# Altium PCB PCB1.PcbDoc
Units mil, origin at the board's own origin, x right, y up, seen from the top; angles counter-clockwise.
Board outline 3290 x 1870 mil, 2 copper layers (Top Layer, Bottom Layer); 97 components, 61 nets, 288 pads, 265 vias.
Unrouted connection lines stored in the file: 2.
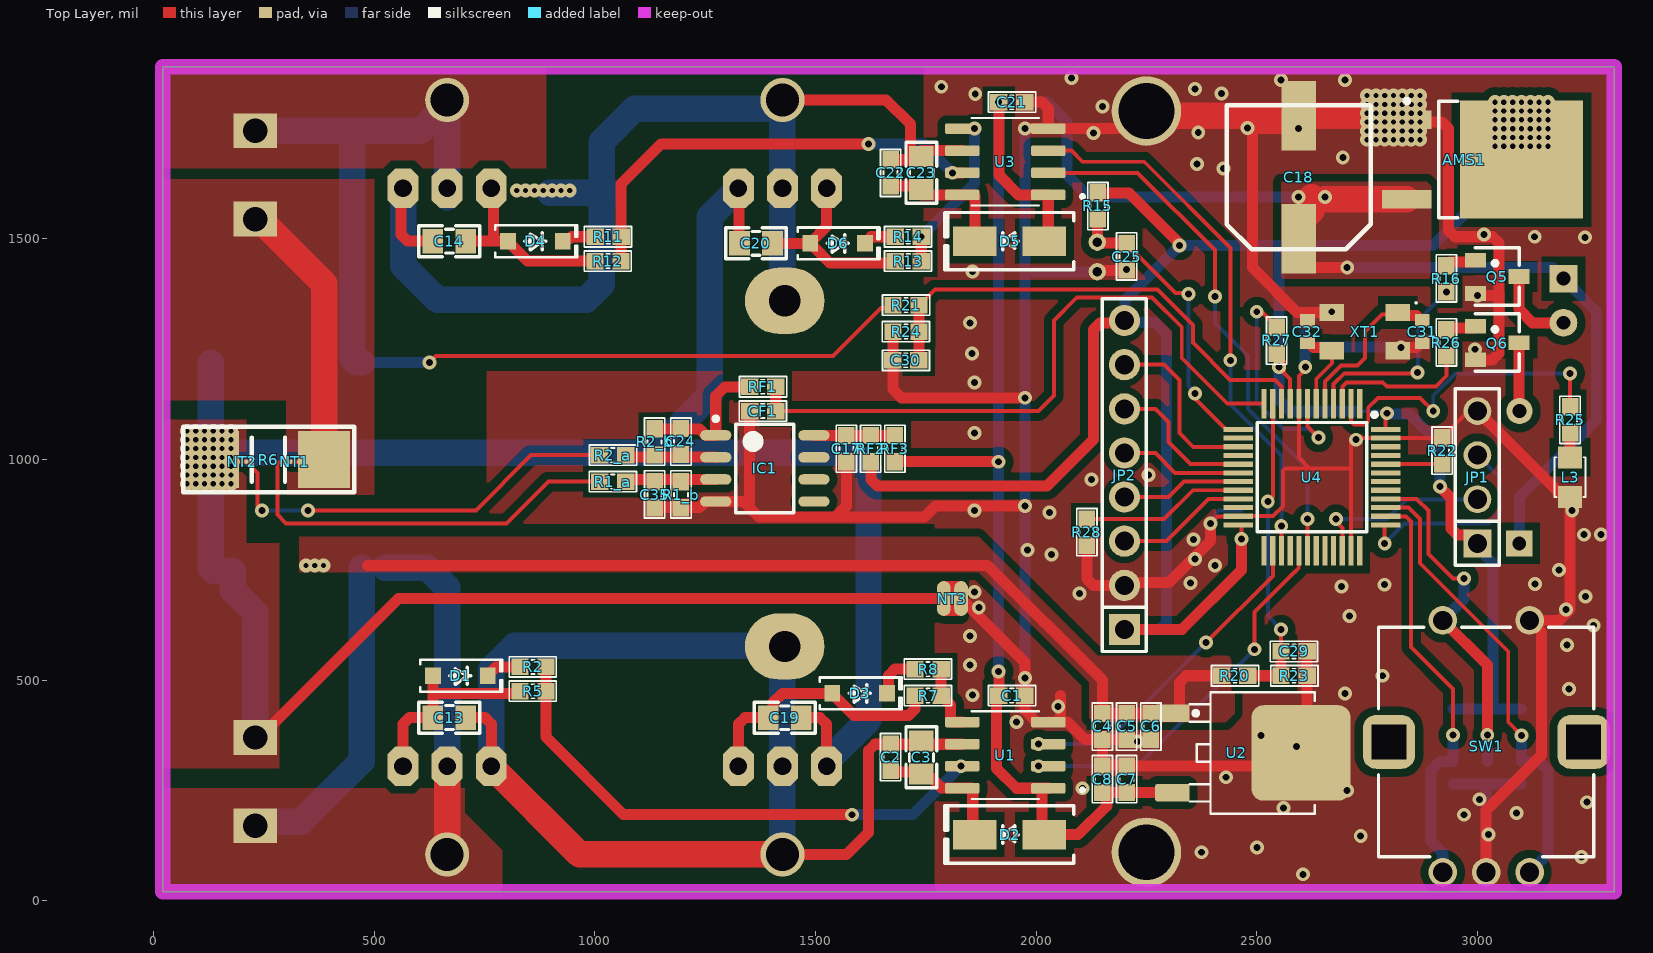
[diagram p0: Top Layer view]
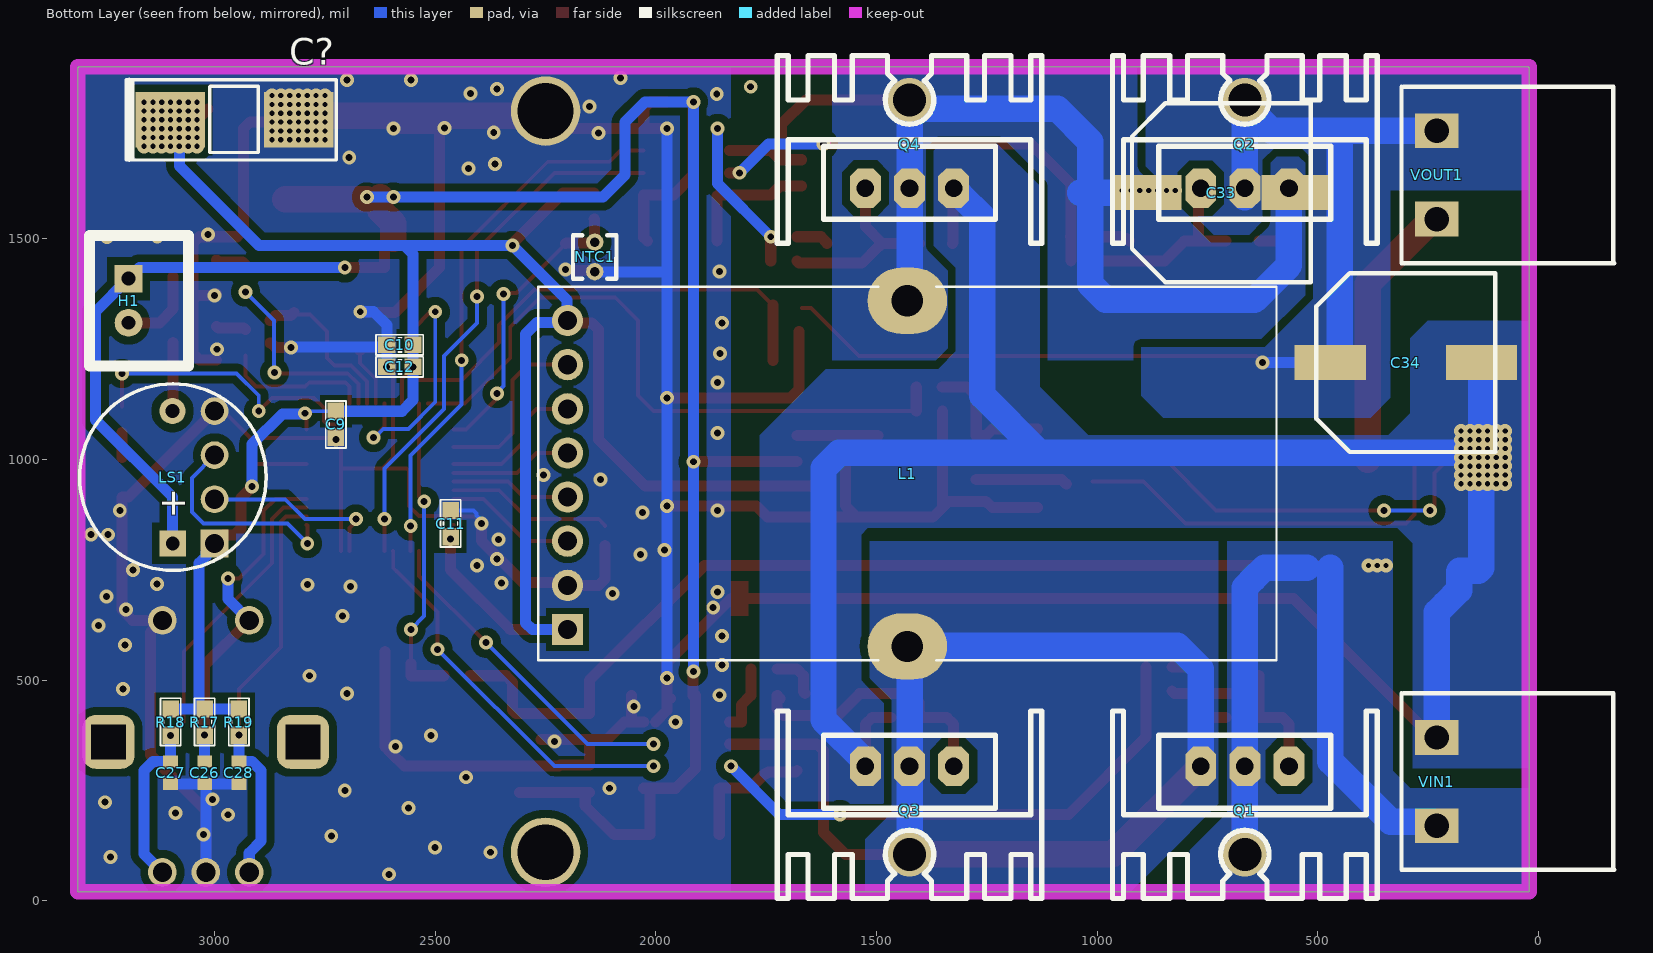
[diagram p1: Bottom Layer view, seen from below]

## Layer stack, top to bottom
Top Solder: solder mask 0.4, Solder Resist, Dk 3.5
Top Layer: signal copper 1.4
Dielectric 1: dielectric 12.6, FR-4, Dk 4.8
Bottom Layer: signal copper 1.4
Bottom Solder: solder mask 0.4, Solder Resist, Dk 3.5

## Board outline
20,20 20,1890 3310,1890 3310,20

## Design rules (kind name [scope] priority, off if disabled: settings)
Clearance [All] p1: gap=8 ignorepadtopadclearanceinfootprint=FALSE
PlaneConnect [All] p1: planeconnectstyle=Direct reliefexpansion=20 reliefentries=4 reliefconductorwidth=10 reliefairgap=10
PolygonConnect [All] p1: connectstyle=Direct reliefconductorwidth=10 reliefentries=4 polygonreliefangle="90 Angle" airgapwidth=10
RoomDefinition Sheet2 [InComponentClass('Sheet2')] p1: confinementstyle=ConfineIn formatcopy=TRUE lockcomponents=FALSE outline -2275,-6325 -275,-6325 -275,-5325 -2275,-5325
RoutingVias [All] p1: holewidth=15.75 width=31.5 viastyle="Through Hole" minholewidth=15.75 minwidth=31.5 maxholewidth=15.75 maxwidth=31.5
SolderMaskExpansion [All] p1: expansion=4 istentingtop=FALSE
Width [All] p1: maxlimit=60 minlimit=9 preferedwidth=25
29 further rules are at their usual default settings.

## Components (designator, comment, footprint, x,y, rotation, side; value= is the part's Value field where it differs from the comment)
AMS1 "AMS1117" "TO 252" 2773.86,1538.62 r0 top
C1 "104" "tu 0603" 1945,465 r0 top
C2 "104" "tu 0603" 1670,325 r90 top
C3 "104" "tu 0805" 1740,325 r270 top
C4 "104" "tu 0603" 2150,395 r270 top
C5 "104" "tu 0603" 2205,395 r270 top
C6 "104" "tu 0603" 2260,395 r270 top
C7 "104" "tu 0603" 2205,275 r90 top
C8 "104" "tu 0603" 2150,275 r90 top
C9 "104" "tu 0603" 2725,1080 r270 bottom
C10 "104" "tu 0603" 2580,1260 r0 bottom
C11 "104" "tu 0603" 2465,855 r90 bottom
C12 "104" "tu 0603" 2580,1210 r0 bottom
C13 "100" "tu 0805" 670,415 r180 top
C14 "100" "tu 0805" 670,1494.87 r180 top
C17 "104" "tu 0603" 1570,1025 r270 top
C18 "100uF" "tu nhom 8 (f)" 2595,1640 r90 top
C19 "100" "tu 0805" 1430,415 r0 top
C20 "100" "tu 0805" 1365,1490 r180 top
C21 "104" "tu 0603" 1945,1810 r0 top
C22 "104" "tu 0603" 1670,1650 r270 top
C23 "104" "tu 0805" 1740,1650 r270 top
C24 "100" "tu 0603" 1195,1041 r270 top
C25 "102" "tu 0603" 2205,1460 r90 top
C26 "0.1uF" CAPC1608X09L 3022.5,290 r90 bottom
C27 "0.1uF" CAPC1608X09L 3100,290 r90 bottom
C28 "0.1uF" CAPC1608X09L 2945,290 r90 bottom
C29 "102" "tu 0603" 2584.53,565 r180 top
C30 "102" "tu 0603" 1704.53,1225 r0 top
C31 "10pF" CAPC1608X09L 2875,1290 r90 top
C32 "10pF" CAPC1608X09L 2615,1290 r270 top
C33 "1000uF" "tu nhom 10 (G)" 717.99,1605.09 r180 bottom
C34 "1000uF" "tu nhom 10 (G)" 300,1220 r180 bottom
C35 "100" "tu 0603" 1135,920.47 r90 top
C? "47uF" "tu tantalum smd7343" 2955,1770 r180 bottom
CF1 "104" "tu 0603" 1380,1110 r0 top
D1 "S4" "DIODE SOD-123" 695,510 r0 top
D2 "SS34" "DIODE SMA" 1940,150 r180 top
D3 "S4" "DIODE SOD-123" 1600,470 r0 top
D4 "S4" "DIODE SOD-123" 865,1495 r0 top
D5 "SS34" "DIODE SMA" 1940,1495 r180 top
D6 "S4" "DIODE SOD-123" 1550,1490 r0 top
H1 "FAN" XH2.54M-2 3195,1410 r270 bottom
IC1 "LM358 SOP8" "SOP 8" 1385,980 r0 top
JP1 "debug" "JP 1x4 DT" 3000,810 r90 top
JP2 "lcd_1.8 inch" "JP 1x8 DT" 2200,615 r90 top
L1 "ATCA-08-251M-V" IND_ATCA-08-251M-V 1430,968.27 r90 bottom locked
L3 "LED 0805" LED-0805-Red 3210,1005 r270 top
LS1 "Coi Chip Speaker" "Coi Chip Speacker" 3095,810 r90 bottom
NT1 "0.25mm" NetTie_0.25mm 329.68,995 r180 top net-tie
NT2 "0.25mm" NetTie_0.25mm 190.32,995 r0 top net-tie
NT3 "NetTie_2mm" NetTie_2mm 1790.63,685 r0 top net-tie
NTC1 "10k" MF52 2140,1460 r90 bottom
Q1 "IRFZ44" QTO-220H3 565,305 r0 bottom locked
Q2 "IRFZ44" QTO-220H3 765,1615 r180 bottom
Q3 "IRFZ44" QTO-220H3 1325,305 r0 bottom locked
Q4 "IRFZ44" QTO-220H3 1525,1615 r180 bottom
Q5 "HF" SOT-23 3045,1415 r270 top value=C9014
Q6 "HF" SOT-23 3045,1265 r270 top value=C9014
R1_a "10K" "Tro smd 0603" 1040,950 r0 top
R1_b "30K" "Tro smd 0603" 1195,920.47 r90 top
R2 "2.2R" "Tro smd 0603" 859.53,530 r180 top
R2_a "10K" "Tro smd 0603" 1040.47,1010 r0 top
R2_b "30K" "Tro smd 0603" 1135,1040 r90 top
R5 "10R" "Tro smd 0603" 859.53,475 r180 top
R6 "0.01R" "tro smd 2512" 260,1000 r0 top
R7 "10R" "Tro smd 0603" 1755,465 r180 top
R8 "2.2R" "Tro smd 0603" 1755,525 r180 top
R11 "2.2R" "Tro smd 0603" 1030,1505 r180 top
R12 "10R" "Tro smd 0603" 1029.53,1450 r180 top
R13 "10R" "Tro smd 0603" 1710,1450 r180 top
R14 "2.2R" "Tro smd 0603" 1710,1505 r180 top
R15 "10k" "tro smd 0603" 2140,1575 r270 top
R16 "4.7K" "Tro smd 0603" 2930,1410 r90 top
R17 "10k" "Tro smd 0603" 3022.5,405 r90 bottom
R18 "10k" "Tro smd 0603" 3100,405 r90 bottom
R19 "10k" "Tro smd 0603" 2945,405 r90 bottom
R20 "10k" "tro smd 0603" 2450.47,510 r0 top
R21 "10k" "tro smd 0603" 1705,1350 r0 top
R22 "10k" "Tro smd 0603" 2920,1019.53 r90 top
R23 "100k" "tro smd 0603" 2584.53,510 r0 top
R24 "100k" "tro smd 0603" 1705,1290 r180 top
R25 "10k" "Tro smd 0603" 3210,1090.47 r270 top
R26 "4.7K" "Tro smd 0603" 2930,1265 r90 top
R27 "10k" "Tro smd 0603" 2545,1270 r270 top
R28 "10k" "Tro smd 0603" 2115,835 r90 top
RF1 "100R" "Tro smd 0603" 1380.47,1165 r0 top
RF2 "0R" "Tro smd 0603" 1625,1025 r270 top
RF3 "0R" "Tro smd 0603" 1680,1025 r270 top
SW1 "482024764004" 482024764004 3020,360 r270 top locked
U1 "IR2101S" SOIC127P600X175-8N 1930,330 r180 top
U2 "78M12 SMD TO252" TO252 2454.33,335 r270 top
U3 "IR2101S" SOIC127P600X175-8N 1930,1675 r180 top
U4 "STM32F103C8T6" LQFP-48_19.6_393_58X11_SMD 2625,960 r270 top
VIN1 "CON 2 EDG5.08" "CON 2 2EDG5.08" 230,370 r270 bottom
VOUT1 "CON 2 EDG5.08" "CON 2 2EDG5.08" 230,1745 r270 bottom
XT1 "8 MHz" DFN220P320X110-4N 2745,1290 r180 top

## Footprints (in the part's own frame and the unit in brackets; to place one, negate y for a bottom-side part, rotate by r counter-clockwise, add the part's x,y. Pads: shape width x height; smd on the part's side, far side on the other; paste and mask are expansions set on the pad)
482024764004 [mm]
  round 1.65 hole 1.1: 1(-7,-2.5) 2(-7,2.5) A(7.5,-2.5) B(7.5,2.5) C(7.5,0)
  rrect50% 3.1x3 hole 2 square: S1(0,5.6) S2(0,-5.6)
  silkscreen extent -6.6,-6.2 6.6,6.2, body extent -7.32,-6.81 7.8,6.81, height 20.1
CAPC1608X09L [mm]
  rect 0.7x0.85 smd: 1(-0.65,0) 2(0.65,0)
  body extent -0.85,-0.45 0.85,0.45, height 0.9
"Coi Chip Speacker" [mm]
  rect 1.5x1.5 hole 0.8: 1(0,0)
  round 1.5 hole 0.8: 2(7.62,0.013)
  silkscreen extent -1.55,-5.38 9.18,5.36, body extent -2.22,-6 13.24,6, height 4.5
"CON 2 2EDG5.08" [mm]
  rect 2x2.5 hole 1.4: 1(0,0) 2(5.08,0)
  silkscreen extent -2.54,-2.03 7.62,10.21, body extent -2.5,-1.75 7.58,10.25, height 3.15
DFN220P320X110-4N [mm]
  rect 1.4x1 smd: 1(-1.9,-1.1) 3(1.9,1.1) G(-1.9,1.1) G(1.9,-1.1)
  silkscreen extent -3,-1.7 -2.9,-1.6, body extent -2.55,-1.65 2.55,1.65, height 1.1
"DIODE SMA" [mm] "SMA"
  rect 2.5x1.7 smd: 1(-2,0) 2(2,0)
  silkscreen extent -3.68,-1.65 3.75,1.65, body extent -2.6,-1.37 2.6,1.37, height 2.4
"DIODE SOD-123" [mm] "SOD-123"
  rect 0.9x0.95 smd: 1(-1.575,0) 2(1.575,0)
  silkscreen extent -2.3,-0.92 2.41,0.92, body extent -1.86,-0.78 1.86,0.77, height 1.35
IND_ATCA-08-251M-V [mm]
  oval 3.81x4.572 hole 1.8: 1(-9.95,0) 2(9.95,0)
  silkscreen extent -10.75,-21.25 10.75,21.25, body extent -21.45,-10.75 21.45,10.75, height 21.45
"JP 1x4 DT" [mm] "4 pins, 1 row, straight, gold plating"
  rect 1.6x1.6 hole 1.1: 1(0,0)
  round 1.6 hole 1.1: 2(2.54,0) 3(5.08,0) 4(7.62,0)
  silkscreen extent -1.27,-1.27 8.89,1.27, body extent -1.27,-1.27 8.89,1.27, height 8.54
"JP 1x8 DT" [mm] "8 pins, 1 row, straight, gold plating"
  rect 1.8x1.8 hole 1.1: 1(0,0)
  round 1.8 hole 1.1: 2(2.54,0) 3(5.08,0) 4(7.62,0) 5(10.16,0) 6(12.7,0) 7(15.24,0) 8(17.78,0)
  silkscreen extent -1.27,-1.27 19.05,1.27, body extent -1.27,-1.27 19.05,1.27, height 8.54
LED-0805-Red [mil]
  rect 50x55 smd: 1(0,0) 2(90,0)
  silkscreen extent 0,-35 90,35, body extent 5,-25 85,25, height 43
LQFP-48_19.6_393_58X11_SMD [mm] "48LQFP"
  rect 1.7x0.3 smd mask+0.076: 1(-4.238,2.75) 2(-4.238,2.25) 3(-4.238,1.75) 4(-4.238,1.25) 5(-4.238,0.75) 6(-4.238,0.25) 7(-4.238,-0.25) 8(-4.238,-0.75) 9(-4.238,-1.25) 10(-4.238,-1.75) 11(-4.238,-2.25) 12(-4.238,-2.75) 25(4.238,-2.75) 26(4.238,-2.25) 27(4.238,-1.75) 28(4.238,-1.25) 29(4.238,-0.75) 30(4.238,-0.25) 31(4.238,0.25) 32(4.238,0.75) 33(4.238,1.25) 34(4.238,1.75) 35(4.238,2.25) 36(4.238,2.75)
  rect 0.3x1.7 smd mask+0.076: 13(-2.75,-4.238) 14(-2.25,-4.238) 15(-1.75,-4.238) 16(-1.25,-4.238) 17(-0.75,-4.238) 18(-0.25,-4.238) 19(0.25,-4.238) 20(0.75,-4.238) 21(1.25,-4.238) 22(1.75,-4.238) 23(2.25,-4.238) 24(2.75,-4.238) 37(2.75,4.238) 38(2.25,4.238) 39(1.75,4.238) 40(1.25,4.238) 41(0.75,4.238) 42(0.25,4.238) 43(-0.25,4.238) 44(-0.75,4.238) 45(-1.25,4.238) 46(-1.75,4.238) 47(-2.25,4.238) 48(-2.75,4.238)
  silkscreen extent -3.72,-3.15 3.15,3.73, body extent -4.5,-4.5 4.5,4.5, height 1.7
MF52 [mm]
  round 1 hole 0.55: 1(-0.869,-0.039) 2(0.831,-0.039)
  silkscreen extent -1.27,-1.29 1.23,1.21, body extent -1.24,-1.24 1.26,2.56, height 5.45
NetTie_0.25mm [mm]
  round 0.25 smd paste-2 mask+0.102: 1(0,0) 2(0.5,0)
  Top Layer region: 0,0.125 0.5,0.125 0.5,-0.125 0,-0.125
NetTie_2mm [mm]
  oval 0.8x2 smd paste-2 mask+0.102: 1(0,0) 2(1,0)
  Top Layer region: 0,1 1,1 1,-1 0,-1
QTO-220H3 [mil] "TO-220 1-2-3"
  oct 70x90 hole 40: 1(0,0) 2(100,0) 3(200,0)
  round 100 hole 75: 2(100,200)
  silkscreen extent -200,-125 400,300, body extent -190,-102 392,323, height 984
SOIC127P600X175-8N [mm]
  rrect25% 1.97x0.6 smd: 1(-2.475,1.905) 2(-2.475,0.635) 3(-2.475,-0.635) 4(-2.475,-1.905) 5(2.475,-1.905) 6(2.475,-0.635) 7(2.475,0.635) 8(2.475,1.905)
  silkscreen extent -4.54,-2.52 1.95,2.53, body extent -3,-2.5 3,2.5, height 1.75
"SOP 8" [mm] "SOIC, 8-Leads, Body 4.9x3.9mm, Pitch 1.27mm, IPC High Density"
  oval 1.8x0.6 smd: 1(-2.825,1.905) 2(-2.825,0.635) 3(-2.825,-0.635) 4(-2.825,-1.905) 5(2.825,-1.905) 6(2.825,-0.635) 7(2.825,0.635) 8(2.825,1.905)
  silkscreen extent -2.95,-2.55 1.68,2.98, body extent -2.99,-2.45 3,2.45, height 1.6
SOT-23 [mm] "SOT 23 _ 1-3-2"
  rect 0.85x1.2 smd: 1(-0.94,-1.245) 2(0.985,-1.25) 3(0.005,1.25)
  silkscreen extent -1.65,-1.27 1.65,1.27, body extent -1.47,-1.33 1.53,1.17, height 1.06
TO252 [mm] "TO252"
  round 0.5 on Mech15: 0(0,0)
  rrect25% 1x2 smd: 1(-2.285,-3.7) 3(2.285,-3.7)
  rrect25% 5.5x5.7 smd: 2(0,3.7)
  silkscreen extent -3.5,-2.7 3.5,4.5, body extent -3.3,-3.95 3.3,5.76, height 2.31
"TO 252" [mm]
  rect 2.85x1.05 smd: 1(1.684,5.881) 3(1.684,1.301)
  rect 7.1x6.8 smd: 2(8.284,3.591)
  silkscreen extent 1.56,0.24 4.61,7.08, body extent 1.25,0.35 10.92,6.89, height 2.29
"Tro smd 0603" [mm] "Chip Capacitor, 2-Leads, Body 1,60x0,80mm, IPC Medium Density"
  rect 1x0.95 smd mask+0.076: 1(-0.75,0) 2(0.75,0)
  silkscreen extent -1.35,-0.58 1.37,0.58, body extent -0.82,-0.42 0.82,0.43, height 0.44
"tro smd 0603" [mm] "Chip Capacitor, 2-Leads, Body 1,60x0,80mm, IPC Medium Density"
  rect 1x0.95 smd mask+0.076: 1(-0.75,0) 2(0.75,0)
  silkscreen extent -1.35,-0.58 1.37,0.58, body extent -0.82,-0.42 0.82,0.43, height 0.44
"tro smd 2512" [mm]
  rect 3x3.3 smd: 1(-3.2,0) 2(3.2,0)
  silkscreen extent -4.9,-1.88 4.93,1.88, body extent -3.12,-1.57 3.18,1.58, height 0.82
"tu 0603" [mm] "Chip Capacitor, 2-Leads, Body 1,60x0,80mm, IPC Medium Density"
  rect 1x0.95 smd mask+0.076: 1(-0.75,0) 2(0.75,0)
  silkscreen extent -1.35,-0.58 1.37,0.58, body extent -0.8,-0.4 0.8,0.4, height 0.9
"tu 0805" [mm] "Compoment SMD 80x50mil"
  rect 1.2x1.4 smd: 1(-0.946,-0.003) 2(0.954,-0.003)
  silkscreen extent -1.75,-0.89 1.75,0.89, body extent -1.01,-0.64 1.01,0.63, height 0.61
"tu nhom 8 (f)" [mm]
  rect 4x2 smd: 1(-3.55,0) 2(3.55,0)
  silkscreen extent -4.15,-4.15 4.15,4.15, body extent -4.85,-4.25 4.85,4.25, height 10.5
"tu nhom 10 (G)" [mm]
  rect 4.1x2 smd: 1(-4.35,0) 2(4.35,0)
  silkscreen extent -5.15,-5.15 5.15,5.15, body extent -5.9,-5.25 5.9,5.25, height 10.5
"tu tantalum smd7343" [mm]
  rect 4x3.2 smd: 1(-3.7,0) 2(3.7,0)
  silkscreen extent -6.23,-2.31 5.85,2.31, body extent -3.75,-2.33 3.85,2.27, height 3.99
XH2.54M-2 [mm]
  rect 1.6x1.6 hole 0.8: 1(0,0)
  round 1.6 hole 0.8: 2(2.54,0)
  silkscreen extent -2.48,-2.26 5.02,3.46, body extent -2.48,-2.26 5.02,3.48, height 6.91

## Part data
C1 C2 C4 C5 C6 C7 C8 C9 C10 C11 C12 C21 C22: library part "Tu 0603 101 50V 10%", "Dán", Chung_Loai=Dán, Don_Vi=Con, Ma_Hang=MH004565, So_Chan=2, Ten_Linh_Kien="Tụ 0603 101-0.1nF 10% 50V"
C3 C23: library part "Tu 0805 101 50V 20%", "Dán", Chung_Loai=Dán, Don_Vi=Con, Ma_Hang=MH002806, So_Chan=2, Ten_Linh_Kien="Tụ 0805 101-0.1nF 50V 20%"
C13 C14 C19 C20: library part "Tu 0805 104 50V 10%", "Dán", Chung_Loai=Dán, Don_Vi=Con, Ma_Hang=MH004551, So_Chan=2, Ten_Linh_Kien="Tụ 0805 104-100nF 10% 50V"
C17 C24 C35 CF1: library part "Tu 0603 106 16V 20%", "Dán", Chung_Loai=Dán, Don_Vi=Con, Ma_Hang=MH004848, So_Chan=2, Ten_Linh_Kien="Tụ 0603-10uF 20% 16V"
C18: library part "Tu Nhom 100uF 50V", "Dán", Chung_Loai=Dán, Don_Vi=Con, Ma_Hang=MH002223, So_Chan=2, Ten_Linh_Kien="Tụ Nhôm 100uF 50V 8x10.2MM"
C25 C29 C30: library part "Tu 0603 104 50V 10%", "Dán", Chung_Loai=Dán, Don_Vi=Con, Ma_Hang=MH004568, So_Chan=2, Ten_Linh_Kien="Tụ 0603 104-100nF 10% 50V"
C26 C27 C28: library part GRM188R71H104KA93D, "CAP CER 0.1UF 50V X7R 0603", Manufacturer="Murata Electronics North America", Operating Temperature="-55°C ~ 125°C", Package / Case="0603 (1608 Metric)", Ratings=-, Supplier Part Number 1=490-1519-2-ND, Temperature Coefficient=X7R, Tolerance=±10%, Voltage - Rated=50V, Applications="General Purpose", Capacitance=0.1uF, Category=Capacitors, ComponentLink1Description=http://www.murata.com/~/media/webrenewal/support/library/catalog/products/capacitor/mlcc/c02e.ashx?la=en-us, ComponentLink1URL=http://www.murata.com/~/media/webrenewal/support/library/catalog/products/capacitor/mlcc/c02e.ashx?la=en-us, Features=-, Height - Seated (Max)=-, Lead Spacing=-, Lead Style=-, Manufacturer Part Number=GRM188R71H104KA93D, Mounting Type="Surface Mount, MLCC", Packaging="Tape & Reel (TR)", Part Status=Active, Pricing 1="4000=0.01822, 8000=0.01663, 12000=0.01584 (USD)", Pricing 2="1=0.12, 10=0.084, 100=0.0396, 500=0.02778, 1000=0.023 (USD)", RoHS="RoHS Compliant", Size / Dimension="0.063\" L x 0.032\" W (1.60mm x 0.80mm)", Stock=19812000, Supplier 1=Digi-Key, Supplier 2=Digi-Key, Supplier Part Number 2=490-1519-1-ND, Thickness (Max)="0.035\" (0.90mm)"
C31 C32: library part GRM188R71H104KA93D, "CAP CER 0.1UF 50V X7R 0603", Capacitance=0.1uF, Manufacturer="Murata Electronics North America", Operating Temperature="-55°C ~ 125°C", Package / Case="0603 (1608 Metric)", Ratings=-, Supplier Part Number 1=490-1519-2-ND, Temperature Coefficient=X7R, Tolerance=±10%, Voltage - Rated=50V, Applications="General Purpose", Category=Capacitors, ComponentLink1Description=http://www.murata.com/~/media/webrenewal/support/library/catalog/products/capacitor/mlcc/c02e.ashx?la=en-us, ComponentLink1URL=http://www.murata.com/~/media/webrenewal/support/library/catalog/products/capacitor/mlcc/c02e.ashx?la=en-us, Features=-, Height - Seated (Max)=-, Lead Spacing=-, Lead Style=-, Manufacturer Part Number=GRM188R71H104KA93D, Mounting Type="Surface Mount, MLCC", Packaging="Tape & Reel (TR)", Part Status=Active, Pricing 1="4000=0.01822, 8000=0.01663, 12000=0.01584 (USD)", Pricing 2="1=0.12, 10=0.084, 100=0.0396, 500=0.02778, 1000=0.023 (USD)", RoHS="RoHS Compliant", Size / Dimension="0.063\" L x 0.032\" W (1.60mm x 0.80mm)", Stock=19812000, Supplier 1=Digi-Key, Supplier 2=Digi-Key, Supplier Part Number 2=490-1519-1-ND, Thickness (Max)="0.035\" (0.90mm)"
C33 C34: library part "Tu Nhom 1000uF 10V", "Dán", Chung_Loai=Dán, Don_Vi=Con, Ma_Hang=MH007515, So_Chan=2, Ten_Linh_Kien="Tụ Nhôm 1000uF 10V"
C?: library part "Tu tantalum 47uF 25V SMD7343", "Dán", Chung_Loai=Dán, Don_Vi=Con, Ma_Hang=MH002162, So_Chan=2, Ten_Linh_Kien="Tụ tantalum 476E-47uF 25V SMD7343"
D1 D3 D4 D6: library part "Diode S4", "Dán", Chung_Loai=Dán, Don_Vi=Con, Ma_Hang=MH005519, Ten_Linh_Kien="Diode S4 SOD123 ( 1N5819 SOD123)"
D2 D5: library part "Diode SS34 ( 1N5822 )", "Dán", Chung_Loai=Dán, Don_Vi=Con, Ma_Hang=MH002104, Ten_Linh_Kien="Diode SS34 3A 40V SMA ( 1N5822 SS34A)"
H1: library part "Header 2P 2.54 Duc Thang", "Cắm", Chung_Loai=Cắm, Don_Vi=Con, Ma_Hang=MH001283, Ten_Linh_Kien="Header 2P XH2.54-2P Đực Thẳng"
IC1: "Dán", Chung_Loai=Dán, Don_Vi=Con, Ma_Hang=MH000609, Ten_Linh_Kien="LM358 SOP8"
JP1: library part "JP 1x4 2.54 Duc Thang", "Cắm", Chung_Loai=Cắm, Don_Vi=Con, Ma_Hang=MH000903, Ten_Linh_Kien="Jump Đơn Đực 2.54MM 1x40P Thẳng 11MM"
JP2: library part "JP 1x8 2.54 Duc Thang", "Cắm", Chung_Loai=Cắm, Don_Vi=Con, Ma_Hang=MH000903, Ten_Linh_Kien="Jump Đơn Đực 2.54MM 1x40P Thẳng 11MM"
L1: "250 ÂµH Unshielded Toroidal Inductor 10 A 27mOhm Max Radial, Vertical (Open)", Package=Package, Check_prices=https://www.snapeda.com/parts/ATCA-08-251M-V/Abracon/view-part/?ref=eda, MF="Abracon LLC", MP=ATCA-08-251M-V, SnapEDA_Link=https://www.snapeda.com/parts/ATCA-08-251M-V/Abracon/view-part/?ref=snap
L3: library part "LED 0805 Do", "Dán", Chung_Loai=Dán, Don_Vi=Con, Ma_Hang=MH000897, Ten_Linh_Kien="LED 0805 Màu Đỏ (Red)"
LS1: "Còi chip"
NT1 NT2: library part NetTie_0.25mm
NTC1: library part NCP15XH103F03RC, "THERMISTOR 10K OHM NTC 0402 SMD"
Q1 Q2 Q3 Q4: "HEXFET N-Channel Power MOSFET"
Q5 Q6: library part "Trans C1815 HF SMD", "SOT-23"
R1_a R1_b R2 R2_a R2_b R5 R7 R8 R11 R12 R13 R14 R16 R17 R18 R19 R22 R25 R26 R27 R28 RF1 RF2 RF3: library part "Tro 0603 5% 10R", "Dán", Chung_Loai=Dán, Don_Vi=Con, Ma_Hang=MH006317, So_Chan=2, Ten_Linh_Kien="Trở 0603 5% 10R"
R6: library part "Tro 2512 1% 0.01R", "Dán", Chung_Loai=Dán, Don_Vi=Con, Ma_Hang=MH004912, So_Chan=2, Ten_Linh_Kien="Trở 2512 1% R010-0.01R 1W"
R15 R20 R21 R23 R24: library part "Tro 0603 5% 10k", "Dán", Chung_Loai=Dán, Don_Vi=Con, Ma_Hang=MH006316, So_Chan=2, Ten_Linh_Kien="Trở 0603 5% 10k"
SW1: "WS-ENTV Mechanical Incremental Encoder Switch, Plastic Shaft without bushing, 24Pulse/360°, 24positi", Insulation Resistance=100MΩ, Manufacturer="Wurth Elektronik", Operating Temperature Max=85°C, Operating Temperature Min=-40°C, Rated Current=10mA, Category="Encoder Switches", ComponentLink1Description="Website Link", ComponentLink1URL=https://www.we-online.com/redexpert/article/482024764004?ad, ComponentLink2Description="Datasheet Link", ComponentLink2URL=https://www.we-online.com/redexpert/spec/482024764004?ad, Detent=24positions, Electrical Life Encoder=30000Cycles, Electrical Life Switch=20000Cycles, Height=20mm, Length=13.2mm, Manufacturer Part Number=482024764004, Match Code=WS-ENTV, Mount="Through Hole", Operation Force=300g, Packaging=Tray, Resolution=24Pulse/360°, Width=12.4mm
U1 U3: "Half-Bridge Gate Driver IC Non-Inverting 8-SOIC", Package="SOIC-8 Infineon", Check_prices=https://www.snapeda.com/parts/IR2101S/Infineon/view-part/?ref=eda, MF="Infineon Technologies", MP=IR2101S, SnapEDA_Link=https://www.snapeda.com/parts/IR2101S/Infineon/view-part/?ref=snap
U2: library part "78M05 SMD TO252", "Dán", Chung_Loai=Dán, Don_Vi=Con, Ma_Hang=MH001917, Ten_Linh_Kien="78M05 TO252"
U4: library part IC_STM32F103C8T6, "ARM® Cortex®-M3 STM32F1 Microcontroller IC 32-Bit 72MHz 64KB (64K x 8) FLASH 48-LQFP (7x7)", Alternate Part Number-1=NA, Case/Package=LQFP48, Manufacturer=STMicroelectronics, Manufacturer Part Number=STM32F103C8T6, Supplier Part Number-1=STM32F103C8T6, Supplier-1=LCSC
VIN1 VOUT1: "Cắm", Chung_Loai=Cắm, Don_Vi=Con, Ma_Hang=MH000759, Ten_Linh_Kien="CON 2 2EDG5.08-2P 5.08MM ( Xanh Cong)"
XT1: library part ABM3B-8.000MHZ-10-1-U-T, "Crystal 8MHz ±10ppm 10pF 200 Ohm -10°C ~ 60°C Surface Mount 4-SMD, No Lead (DFN, LCC)", Frequency Stability=±10ppm, Load Capacitance=10pF, Manufacturer="Abracon LLC", Operating Mode=Fundamental, Operating Temperature="-10°C ~ 60°C", Package / Case="4-SMD, No Lead", Ratings=-, Supplier Part Number 1=535-9721-1-ND, Category="Crystals, Oscillators, Resonators", ComponentLink1Description=http://www.abracon.com/Resonators/abm3b.pdf, ComponentLink1URL=http://www.abracon.com/Resonators/abm3b.pdf, Frequency Tolerance=±10ppm, Height - Seated (Max)="0.043\" (1.10mm)", Manufacturer Part Number=ABM3B-8.000MHZ-10-1-U-T, Mounting Type="Surface Mount", Packaging="Cut Tape (CT)", Part Status=Active, Pricing 1="1=0.69, 10=0.578, 50=0.5198, 100=0.462, 500=0.4389 (USD)", Pricing 2="1000=0.336, 3000=0.315, 5000=0.3045, 10000=0.294 (USD)", RoHS="RoHS Compliant", Size / Dimension="0.197\" L x 0.126\" W (5.00mm x 3.20mm)", Stock=35437, Supplier 1=Digi-Key, Supplier 2=Digi-Key, Supplier Part Number 2=535-9721-2-ND, Type="MHz Crystal"

## Free pads (board coordinates)
  round 157.48 hole 125.98: 5(2250,110) 5(2250,1790)

## Via types
v1: diameter 31.5, hole 11.81, Top Layer to Bottom Layer, tented both sides, 136 vias
v2: diameter 31.5, hole 15.75, Top Layer to Bottom Layer, tented both sides, 129 vias

## Nets (pads, with @x,y where several pads share a name; then routed paths per layer and width w, separated by ;. In a path a pad name is that pad's centre, name@x,y a point inside that pad or via, vN(x,y) a via of type N, cw(c..) or ccw(c..) an arc to the next point about the centre after c; other vN are vias at no path point)
3v3: AMS1.2 C9.1 C10.1 C11.1 C12.1 C?.1 JP1.1 JP2.1 JP2.8 R15.1 R17.2 R18.2 R19.2 R27.2 RF2.2 U4.9 U4.24 U4.48 | length 5450.7
  Top Layer w9: U4.24 2463.59,851.73 2465,850.33 v2(2465,820) ; R27.2@2562.24,1222.24 2562.24,1195.8 2575.79,1182.26 U4.9 ; U4.48 v2@2791.85,1102.88
  Top Layer w25: RF2.2 1625.59,994.88 1625.59,954.64 1640.24,940 2025,940 2130,1045 2130,1295 2144.64,1309.64 2194.64,1309.64 JP2.8 ; R15.1 2210.47,1604.53 2323.76,1491.24 2323.76,1486.24 v2(2325,1485) ; JP2.1@2190.65,624.35 JP2.1 2330,615 2465,750 v2(2465,820) ; v2(2915,939.25) 2915,937.49 2940,912.49 2940,843.64 2954.64,829 2981,829 JP1.1 ; AMS1.2@3015,1795 v1(3040,1770)
  Bottom Layer w9: C9.1 2790.47,1109.53 v2(2795,1105)
  Bottom Layer w25: JP2.1 2280,615 2295,630 2295,1285 2269,1311 2204,1311 JP2.8 2201.29,1316.29 2201.29,1361.29 v2@2323.76,1483.76 ; v2(2325,1485) 2570,1485 ; C9.1 2575.47,1109.53 2550.47,1134.53 C12.1 2550.47,1465.47 2570,1485 ; v2(2795,1105) 2796.24,1103.76 2846.24,1103.76 2915,1035 v2(2915,939.25) ; R19.2 R17.2 ; JP1.1 3019,791 3019,781 3035,765 3035,447.03 R17.2 ; v1(3040,1770) C?.1 3079.55,1748.88 3079.55,1665.45 2899.09,1485 2570,1485 ; R18.2 R17.2
  other v1: 3040,1710 3060,1710 3080,1710 3100,1710 3120,1710 3140,1710 3160,1710 3040,1730 3060,1730 3080,1730 3100,1730 3120,1730 3140,1730 3160,1730 3040,1750 3060,1750 3080,1750 3100,1750 3120,1750 3140,1750 3160,1750 3060,1770 3080,1770 3100,1770 3120,1770 3140,1770 3160,1770 3040,1790 3060,1790 3080,1790 3100,1790 3120,1790 3140,1790 3160,1790 3040,1810 3060,1810 3080,1810 3100,1810 3120,1810 3140,1810 3160,1810
  other v2: 2550,1210
+12: AMS1.3 C1.1 C7.1 C8.1 C18.1 C21.1 D2.1 D5.1 H1.1 LS1.1 RF3.2 U1.1 U2.3 U3.1 | length 5309.7
  Top Layer w25: RF3.2 1914.53,995.47 v2(1915,995) ; C1.1@1910,466.8 1910,300 1955,255 U1.1@2014.43,255 ; v2(1915,520) 1915.47,519.53 C1.1 ; C21.1 1915.47,1644.53 1960,1600 U3.1 2027.44,1503.7 D5.1 ; D2.1@2013.74,150 2013.74,254.31 U1.1@2014.43,255 ; D2.1 2095,150 2160,215 C8.1@2160,245.47 ; U1.1 U1.1@2014.43,255 ; C8.1 C8.1@2160,245.47 ; U2.3 2160.43,245.04 C8.1@2160,245.47 ; C18.1 2615,1480.24 2615,1435 v2(2705,1435)
  Top Layer w60: C18.1 2595,1535 2625,1565 2625,1595 ; v2@2655,1589.84 AMS1.3
  Bottom Layer w25: v2(1915,520) v2(1915,995) v2(1915,1810) 2025,1810 2070,1765 2070,1645 2120,1595 v2(2595,1595) v2(2655,1595) ; v2(2705,1435) 3170,1435 H1.1 3270,1335 3270,1090 3095,915 LS1.1
A0: JP2.5 U4.18 | length 276.9
  Top Layer w9: JP2.5 2270,1015 2315.16,969.84 U4.18
buzzer: R26.1 U4.3 | length 338.1
  Top Layer w9: U4.3 2694.18,1127.13 2694.18,1165.91 2703.27,1175 2785.57,1175 2794.82,1165.75 2905.75,1165.75 2930,1190 R26.1
CLK: JP1.3 U4.37 | length 483.5
  Top Layer w9: v2(2790,810) 2790,850.33 2791.41,851.73 U4.37
  Bottom Layer w9: v2(2790,810) 2835,855 3025,855 3051.27,881.27 3051.27,958.73 JP1.3
CS: JP2.3 U4.21 | length 297.8
  Top Layer w9: JP2.3 2295,815 2390.79,910.79 U4.21
current_sense: CF1.2 RF1.2 U4.12 | length 1508.9
  Top Layer w9: CF1.2 2005,1110 2040,1145 2040,1315 2092,1367 2263,1367 2330,1300 2330,1230 2433.15,1126.85 U4.12
  Top Layer w25: CF1.2 1409.76,1110.24 1409.76,1164.76 RF1.2
enc_a: C28.2 R19.1 SW1.A U4.38 | length 946.2
  Top Layer w9: U4.38 2821.94,871.42 2822.22,871.14 2838.41,871.14 2850,859.54 2850,575 2945,480 v2(2945,375.47)
  Bottom Layer w25: SW1.A 2921.57,108.43 2895,135 2895,295 2915.59,315.59 C28.2 v2(2945,375.47)
enc_b: C27.2 R18.1 SW1.B U4.39 | length 1050.1
  Top Layer w9: U4.39 2843.9,891.1 2870,865 2870,765 3070,565 3070,405 v2(3100,375)
  Bottom Layer w9: v2(3100,375) R18.1
  Bottom Layer w25: v2(3100,375) C27.2 3139.41,315.59 3160,295 3160,106.3 SW1.B
enc_c: C26.2 R17.1 SW1.1 U4.40 | length 787.8
  Top Layer w9: U4.40 2862.44,910.79 2889,884.23 2889,786 2945,730 2969.27,730 v2(2969.97,730.7)
  Top Layer w25: SW1.1 3022.5,534.67 v2(3022.5,375.47)
  Bottom Layer w25: SW1.1 2969.97,683.98 v2(2969.97,730.7) ; C26.2 v2(3022.5,375.47)
fan: R16.1 U4.4 | length 456.7
  Top Layer w9: U4.4 2674.21,1171.4 2698.32,1195.51 2864.32,1195.51 v2(2864.32,1197.21)
  Bottom Layer w9: v2(2864.32,1197.21) 2865,1197.21 2865,1315 v2(2930,1380)
GND: AMS1.1 C1.2 C4.2 C5.2 C6.2 C7.2 C8.2 C9.2 C10.2 C11.2 C12.2 C17.2 C18.2 C21.2 C25.1 C26.1 C27.1 C28.1 C29.1 C30.1 C31.1 C32.1 C35.1 C?.2 CF1.1 IC1.4 JP1.4 JP2.2 L3.2 NT3.2 NTC1.1 pad.5 Q5.2 Q6.2 R1_b.1 R22.2 R23.2 R24.2 R28.1 SW1.2 SW1.C U1.4 U2.2 U3.4 U4.8 U4.23 U4.35 U4.47 XT1.G | length 10857.9
  Top Layer w9: v2(2395,855) 2411.19,871.14 2457.87,871.14 U4.23 2458.43,871.7 2536.7,871.7 2560,895 2560,974.73 2565.27,980 2620,980 ; v2(2610,1210) 2610,1203.91 2595.47,1189.39 U4.8 2595.47,1004.53 2620,980 ; U4.35 2713.58,980 ; v2@2713.58,1038.58 2713.58,980 ; v2@2725,1048.58 U4.47 2919.53,1048.58 R22.2 2920,1050.04 2969.63,1099.67 2989.67,1099.67 JP1.4 ; 2620,980 2713.58,980
  Top Layer w25: C35.1 R1_b.1 1237.48,890.94 1251.54,905 IC1.4 1336.3,905 1350.47,890.83 ; CF1.1 1350.47,890.83 ; C17.2 1570,895 1545,870 ; R24.2 1675.24,1289.76 1675.24,1225.24 C30.1 1675,1160 1695,1140 v2(1975,1140) ; NT3.2 1974.53,540.47 C1.2 1975,465.47 v2(1975,505) ; C1.2@1967.34,458.8 1975.24,458.8 1975.24,431.61 U1.4@2001.16,405.69 ; C21.2 2012.8,1810 2027.44,1795.36 U3.4 ; v2(1975,895) 1771.62,895 1746.62,870 1545,870 ; v2(1975,1750) U3.4 ; U1.4 U1.4@2053.03,405 ; 2055,465 2055,406.97 U1.4@2053.03,405 ; R28.1 2115,729.64 2129.64,715 JP2.2 2206.29,721.29 2301.29,721.29 2395,815 v2(2395,855) ; NTC1.1 2140.82,1428.14 2202.66,1428.14 v2(2205,1430.47) ; pad.5@2250,1790 2210,1750 U3.4 ; C6.2 C5.2 C4.2 ; v2(2595,1750) 2490,1750 2490,1435 2591.69,1333.31 2668.31,1333.31 v2(2670,1335) ; C29.1 R23.2 2614.06,349.06 U2.2 2570,305 2220,305 2217.03,307.97 2150,307.97 C4.2 ; v2(2826.99,1253.88) 2861.52,1253.88 2872.05,1264.41 C31.1 ; AMS1.1 AMS1.1@2875.59,1770.16 ; v1(2870,1765) 2920.36,1765 2935,1750.36 2935,1519.64 2949.64,1505 3034.45,1505 3049.09,1490.36 3049.09,1361.56 ; Q6.2 3034.45,1226.2 3049.09,1240.85 3049.09,1361.56 ; Q5.2 v2(3000.02,1371.97) 3038.68,1371.97 3049.09,1361.56 ; JP1.4 3195,915 L3.2 3210,660 3185.59,635.59 SW1.2 3145,609.02 3145,330 3020,205 SW1.C ; 1350.47,890.83 1371.3,870 1545,870 ; U1.4@2053.03,405 2071.15,405 2081.15,395 2110.68,365.47 C4.2
  Top Layer w60: pad.5@2250,1790 2260.24,1779.76 C18.2 2813.78,1779.76 AMS1.1@2814.06,1779.49
  Bottom Layer w9: v2(2395,855) 2395,861.09 2406.84,872.92 2406.84,878.16 2413.2,884.53 C11.2
  Bottom Layer w25: v2(1975,505) v2(1975,895) v2(1975,1140) 1975,1425 ; v2(1975,1750) 1975,1425 ; NTC1.1 2137.68,1425 1975,1425 ; v2(2610,1210) C12.2 C10.2 ; v2(2670,1335) 2640,1335 2609.53,1304.53 C10.2 ; v2(2826.99,1253.88) 2825.75,1255.12 2614.41,1255.12 C10.2 ; C28.1 C26.1 ; SW1.C 3020,261.91 C26.1 ; C27.1 C26.1
  other v1: 2750,1725 2770,1725 2790,1725 2810,1725 2830,1725 2850,1725 2870,1725 2750,1745 2770,1745 2790,1745 2810,1745 2830,1745 2850,1745 2870,1745 2750,1765 2770,1765 2790,1765 2810,1765 2830,1765 2850,1765 2750,1785 2770,1785 2790,1785 2810,1785 2830,1785 2850,1785 2870,1785 2750,1805 2770,1805 2790,1805 2810,1805 2830,1805 2850,1805 2870,1805 2750,1825 2770,1825 2790,1825 2810,1825 2830,1825 2850,1825 2870,1825
  other v2: 2605,60 3236.18,99.12 2375,110 2500.63,120.97 2735.61,146.86 3025,150 2970,195 3088.7,198.81 2560.37,210.58 3248.47,223.39 3005,230 2705,250 2105,255 2430,280 2590,350 2229.52,360.74 2510,375 1955,405 2050,440 1855.96,465.88 2700,470 3207.5,480.11 2785,510 1849.8,534.29 3203.4,579.79 1850,600 3263.49,623.49 2710,645 3200.67,660.36 1870,665 3245,690 2098.14,696.43 1860,700 2691.8,712.39 2789.37,716.37 3131.03,717.71 2350,720 3185,750 2405,760 2360,775 2035,785 1980,795 2356.39,819.2 3241.64,829.69 3280,830 2030,880 1860,885 3215,885 2125,955 2255,965 2725,1045 1860,1060 1860,1175 1855,1240 2995,1250 1850,1310 1855.35,1426.53 3244.39,1503.79 3130,1505 3015,1510 2425,1660 2365,1670 2695,1685 2130,1740 2367.41,1741.34 2478.96,1751.48 2150,1800 1861.9,1828.71 2420,1830 2360,1840 1785,1845 2555,1860 2700,1860 2080,1865
HS1: C13.2 D1.1 Q1.1 R5.2 | length 463.6
  Top Layer w25: Q1.1 565,400.49 579.64,415.13 C13.2 632.71,415.42 632.71,470 ; D1.1 632.71,509.72 632.71,470 ; R5.2 824.8,469.8 730.2,469.8 730,470 632.71,470
HS2: C14.1 D4.1 Q2.1 R12.2 | length 454.4
  Top Layer w25: C14.1 770,1495 ; Q2.1@765,1594.82 Q2.1 770,1610 770,1594.82 770,1495 ; R12.2 945.4,1450 945.2,1449.8 847.21,1449.8 808.21,1488.8 802.99,1494.02 D4.1 770,1495
IO: JP1.2 U4.34 | length 416.2
  Top Layer w9: v2(2680,865) 2680,858.91 2693.9,845.02 U4.34
  Bottom Layer w9: v2(2680,865) 2795,865 2840,910 JP1.2
LS1: C19.1 D3.1 Q3.1 R7.2 | length 606.2
  Top Layer w25: Q3.1 1325,400.22 1339.64,414.87 C19.1 1403.89,425.99 1403.89,448.89 1425,470 D3.1 1537.99,469.02 1587.01,420 1710.36,420 1725,434.64 1725,464.53 R7.2 1724.49,465 1718.29,458.8 R7.2@1718.29,457.81
LS2: C20.1 D6.1 Q4.1 R13.2 | length 439.9
  Top Layer w25: C20.1 1402.3,1490.07 1487.93,1490.07 D6.1 ; Q4.1 1525,1527.99 1487.99,1490.98 D6.1 ; R13.2 1675.47,1445 1532.99,1445 1494.19,1483.8 1493.21,1483.8 1487.99,1489.02 D6.1
MISO: U4.16
MOSI: JP2.6 U4.17 | length 336.5
  Top Layer w9: JP2.6 2270,1115 2300,1085 2300,1040 2350.19,989.81 2457.87,989.81 U4.17
NetC2_1: C2.1 C3.2 D2.2 U1.8 | length 297.6
  Top Layer w25: C2.1@1680,295.47 1684.02,291.45 1745.84,291.45 1749.87,287.43 1753.8,287.43 1785.54,255.69 1854.88,255.69 1856.26,254.31 D2.2@1856.26,150
NetC17_1: C17.1 IC1.8 RF2.1 RF3.1 | length 184
  Top Layer w25: IC1.8 1496.46,1054.76 1679.76,1054.76 RF3.1
NetC22_2: C22.2 C23.2 D5.2 U3.8 | length 302.9
  Top Layer w25: C22.2 1718.85,1620.47 1739.32,1600 U3.8 1858.15,1600 1861.26,1596.89 D5.2
NetC24_1: C24.1 IC1.1 R2_b.2 RF1.1 | length 319.5
  Top Layer w25: R2_b.2 1237.01,1069.53 1251.54,1055 IC1.1 1273.78,1143.78 1295,1165 RF1.1
NetC24_2: C24.2 IC1.2 R2_a.2 R2_b.1 | length 205.9
  Top Layer w25: R2_a.2 1074.31,1005.69 1273.09,1005.69 IC1.2
NetC31_2: C31.2 U4.5 XT1.1 | length 378
  Top Layer w9: U4.5 2654.81,1127.13 2654.81,1177.45 2690.87,1213.51 2728.51,1213.51 2745,1230 2745,1290 2784.02,1329.02 2815.51,1329.02 XT1.1
  Top Layer w25: XT1.1 2826.99,1326.12 2861.52,1326.12 2872.05,1315.59 C31.2
NetC32_2: C32.2 U4.6 XT1.3 | length 197
  Top Layer w9: U4.6 2634.84,1182.94 2670.2,1218.29 XT1.3
  Top Layer w25: C32.2 2617.95,1264.41 2628.48,1253.88 2663.01,1253.88 XT1.3
NetC35_2: C35.2 IC1.3 R1_a.2 R1_b.2 | length 208.4
  Top Layer w25: R1_a.2@1069.53,945 1070.51,945 1080.51,955 IC1.3
NetD1_2: D1.2 R2.2 | length 81.9
  Top Layer w25: D1.2 757.01,510.98 776.02,530 R2.2
NetD3_2: D3.2 R8.2 | length 107.9
  Top Layer w25: D3.2 1665,472.99 1665,510 1680,525 R8.2
NetD4_2: D4.2 R11.2 | length 78.2
  Top Layer w25: D4.2 927.01,1495.98 932.22,1501.2 943.07,1501.2 946.87,1505 R11.2
NetD6_2: D6.2 R14.2 | length 75.3
  Top Layer w25: D6.2 1612.01,1490.98 1626.02,1505 R14.2
NetH1_2: H1.2 Q5.3 | length 187.6
  Top Layer w25: Q5.3 3094.21,1340.79 3125,1310 H1.2
NetL3_1: L3.1 R25.2 | length 55.9
  Top Layer w25: L3.1 R25.2
NetLS1_2: LS1.2 Q6.3 | length 155.3
  Top Layer w25: Q6.3 3094.86,1264.16 3094.86,1110.64 LS1.2
NetNT1_1: NT1.1 R6.2 VOUT1.2 | length 615.4
  Top Layer w60: VOUT1.2 239.84,1545 385.98,1398.86 R6.2
NetQ5_1: Q5.1 R16.2 | length 71.7
  Top Layer w25: R16.2 2930,1440.51 2937.26,1447.77 2991.77,1447.77 Q5.1
NetQ6_1: Q6.1 R26.2 | length 69.1
  Top Layer w25: R26.2 2933.74,1298.26 2992.26,1298.26 Q6.1
NetR2_1: R2.1 R5.1 U1.7 | length 1218.4
  Top Layer w25: R2.1 R5.1 889.06,370.94 1065,195 v2(1582.75,195)
  Bottom Layer w25: v2(1582.75,195) 1720,195 v2(1830,305)
NetR7_1: R7.1 R8.1 U1.5 | length 155.5
  Top Layer w25: R8.1 R7.1 1785.51,465 1806.28,444.23 1806.28,405.69 1806.97,405 U1.5
NetR11_1: R11.1 R12.1 U3.7 | length 1012.8
  Top Layer w25: R12.1 1059.29,1450.24 R11.1@1059.29,1504.76 ; R11.1@1060.51,1505 R11.1 1059.53,1624.53 1150,1715 v2(1620,1715) ; v2(1810,1650) U3.7
  Bottom Layer w25: v2(1620,1715) 1745,1715 v2(1810,1650)
NetR13_1: R13.1 R14.1 U3.5 | length 349.9
  Top Layer w25: R13.1 v2(1739.53,1505)
  Bottom Layer w25: v2(1739.53,1505) 1860,1625.47 v2(1860,1750)
NetR22_1: R22.1 U4.44 | length 128.3
  Top Layer w9: U4.44 2919.53,989.53 R22.1
NetR25_1: R25.1 U4.2 | length 725.1
  Top Layer w9: U4.2 2713.86,1126.57 2713.86,1086.14 2720.11,1079.89 2744.77,1079.89 2752.67,1087.79 2752.67,1117.67 2775,1140 2870,1140 v2(2900,1110) ; R25.1 v2(3210,1195)
  Bottom Layer w9: v2(2900,1110) 2900,1145 2950,1195 v2(3210,1195)
NetR28_2: R28.2 U4.20 | length 377.3
  Top Layer w9: R28.2@2115,849.53 2115,850.51 2129.2,864.71 2130.19,864.71 2130.47,865 2290,865 2355.47,930.47 U4.20
PGND: C19.2 C20.2 C33.2 C34.2 NT2.1 NT3.1 Q3.3 Q4.3 R6.1 VIN1.1 | length 5798.5
  Top Layer w25: VIN1.1 239.84,370 554.84,685 NT3.1 ; Q4.3 1326.21,1613.79 1326.21,1491.35 C20.2 ; C19.2 1510.36,414.87 1525,400.22 Q3.3
  Bottom Layer w60: C34.2 128.74,1065 128.74,1045 v1@128.74,1015 ; VIN1.1 230,653.74 211.87,671.87 179.45,704.29 179.45,745.63 177.57,747.51 136.23,747.51 128.74,755 128.74,945 128.74,965 128.74,985 v1@128.74,1015 ; Q4.3 1325,1605 1320,1600 1310,1600 1260,1550 1260,1145 1130,1015 ; Q3.3 1525,315 1620,410 1620,979.85 1584.85,1015 1130,1015 ; v1@128.74,1015 135,1015 155,1015 175,1015 1130,1015
  other v1: 75,945 95,945 115,945 135,945 155,945 175,945 75,965 95,965 115,965 135,965 155,965 175,965 75,985 95,985 115,985 135,985 155,985 175,985 75,1005 95,1005 115,1005 135,1005 155,1005 175,1005 75,1025 95,1025 115,1025 135,1025 155,1025 175,1025 75,1045 95,1045 115,1045 135,1045 155,1045 175,1045 75,1065 95,1065 115,1065 135,1065 155,1065 175,1065
RESET: R27.1 U4.7 | length 525.5
  Top Layer w9: v2(2500,1335) 2504.3,1330.7 2514.82,1330.7 2545,1300.51 R27.1 ; U4.7 2615.16,1074.84 v2(2640,1050)
  Bottom Layer w9: v2(2500,1335) 2500,1130 2560.81,1069.19 2617.82,1069.19 2637.01,1050 v2(2640,1050)
RST: JP2.4 U4.19 | length 272.7
  Top Layer w9: JP2.4 2300,915 2335.16,950.16 U4.19
SCK: JP2.7 U4.15 | length 405.5
  Top Layer w9: JP2.7 2290,1215 2325,1180 2325,1060 2356.1,1028.9 U4.15
SO1_N: NT2.2 R2_a.1 | length 942.2
  Top Layer w9: NT2.2 235,970 235,895 v2(245,885) ; v2(350,885) 730,885 855,1010 R2_a.1
  Bottom Layer w9: v2(245,885) v2(350,885)
SO1_P: NT1.2 R1_a.1 | length 925
  Top Layer w9: NT1.2 285.27,995 280,989.73 280,875 300,855 800,855 895,950 R1_a.1
temp: C25.2 NTC1.2 R15.2 U4.13 | length 679
  Top Layer w9: C25.2 2205,1488.54 2315.75,1377.79 2342.21,1377.79 v2(2345,1375) ; v2(2360,1150) 2360,1138.86 2430.59,1068.27 U4.13
  Top Layer w25: R15.2 2139.24,1544.71 2139.24,1493.49 NTC1.2 2140.09,1491.13 2203.4,1491.13 C25.2
  Bottom Layer w9: v2(2345,1375) 2345,1166.52 2360,1151.52 v2(2360,1150)
TIM1_CH1: U1.2 U4.29 | length 865.2
  Top Layer w9: v2(2495,570) 2495,655 2586.19,746.19 2587.28,746.19 2595.19,754.09 2595.19,792.87 U4.29
  Bottom Layer w9: v2(2005,305) 2230,305 v2(2495,570)
TIM1_CH1N: U1.3 U4.26 | length 746.2
  Top Layer w9: v2(2384.92,585.05) 2385.05,585.05 2536.42,736.42 U4.26
  Bottom Layer w9: v2(2005,355) 2155,355 2384.92,584.92 v2(2384.92,585.05)
TIM1_CH2: U3.2 U4.30 | length 1218.9
  Top Layer w9: U3.2 2230,1650 2405,1475 v2(2405,1370) ; v2(2615,865) 2615.08,864.92 2615.08,793.23 U4.30
  Bottom Layer w9: v2(2405,1370) 2405,1310 2480,1235 2480,1115 2615,980 v2(2615,865)
TIM1_CH2N: U3.3 U4.27 | length 1238.6
  Top Layer w9: U3.3 2080,1700 2105,1675 2245,1675 2440,1480 v2(2440,1225) ; v2(2555.61,849.39) 2555.86,849.14 2555.86,793.4 U4.27
  Bottom Layer w9: v2(2440,1225) 2440,1125 2555.61,1009.39 v2(2555.61,849.39)
V_IN: C4.1 C5.1 C6.1 C33.1 Q1.2 R20.1 U2.1 VIN1.2 | length 4016.6
  Top Layer w25: 485,760 1890,760 2150,500 C4.1 C5.1 C6.1 2317.38,424.53 2325,432.15 2325,495 2340,510 R20.1
  Top Layer w60: Q1.2@665,105 Q1.2@665,305
  Bottom Layer w25: C33.1 897.99,1605.09 v1(902.99,1610.09)
  Bottom Layer w60: VIN1.2 239.37,179.37 334.37,179.37 471.26,316.26 471.26,755 ; 524.79,755 620,755 644.98,730.02 665,710 665,305 Q1.2@665,140 ; C33.1@897.99,1605.09 1037.99,1605.09
  other v1: 344.79,760.06 364.79,760.06 384.79,760.06 822.77,1610.15 842.77,1610.15 862.77,1610.15 882.77,1610.15 922.77,1610.15 942.77,1610.15
V_OUT: C34.1 Q2.2 R21.1 VOUT1.1 | length 2445.8
  Top Layer w9: v2(625,1220) 640,1235 1540,1235 1648.8,1343.8 R21.1@1669.27,1343.8
  Bottom Layer w25: C34.1 v2(625,1220)
  Bottom Layer w60: VOUT1.1 450,1745 ; C34.1 459.37,1220 450,1229.37 450,1745 ; Q2.2@665,1595 665,1795 654.18,1795 604.18,1745 450,1745
vin_sense: C29.2 R20.2 R23.1 U4.11 | length 709
  Top Layer w9: v2(2525,905) 2536.42,916.42 U4.11 ; 2555,537.5 v2(2555,615)
  Top Layer w25: R20.2 R23.1 2555,537.5
  Bottom Layer w9: v2(2525,905) 2525,645 v2(2555,615)
vout_sense: C30.2 R21.2 R24.1 U4.10 | length 1114.3
  Top Layer w9: R21.2 1735.51,1350 1770.51,1385 2275,1385 2355,1305 2355,1265 2439.25,1180.75 2540.98,1180.75 2555.82,1165.91 2555.82,1127.13 U4.10
  Top Layer w25: C30.2 1734.29,1225.24 1734.29,1290 1734.29,1349.76 R21.2
VS1: C2.2 C3.1 C13.1 L1.1 Q1.3 Q3.2 U1.6 | length 2821.1
  Top Layer w25: C13.1 750.36,415.13 765,400.49 Q1.3 ; Q3.2@1425,105 1570,105 1620,155 1620,340 1634.76,354.76 1832.32,354.76 U1.6
  Top Layer w60: Q1.3 965,105 Q3.2@1425,105
  Bottom Layer w60: Q1.3@765,340 765,525 818.27,578.27 1415,578.27 1425,568.27 1425,305 Q3.2@1425,140
VS2: C14.2 C22.1 C23.1 L1.2 Q2.3 Q4.2 U3.6 | length 2613.6
  Top Layer w25: Q2.3 560,1610 560,1509.64 574.64,1495 C14.2 ; Q4.2@1425,1815 1660,1815 1714.87,1760.13 C23.1@1714.87,1687.23 ; C22.1 1718.85,1679.53 1739.32,1700 U3.6
  Bottom Layer w60: Q2.3@565,1595 565,1440 643.27,1361.73 979.85,1361.73 1015,1396.88 1015,1720 1090,1795 1425,1795 1425,1615 L1.2@1425,1340
pads on no net: IC1.5 IC1.6 IC1.7 SW1.S1 SW1.S2 U2.0 U4.1 U4.14 U4.22 U4.25 U4.28 U4.31 U4.32 U4.33 U4.36 U4.41 U4.42 U4.43 U4.45 U4.46

## Polygon pours and split planes (outlines as drawn)
GND on Bottom Layer "NONET_L-01_P-001" (solid, pour order 12): 1830,1890 1830,20 3310,20 3310,1890
VS2 on Bottom Layer "VS2_L02_P007" (solid, pour order 7): 1600,1890 1600,1225 510,1225 510,1890
V_OUT on Bottom Layer "V_OUT_L02_P006" (solid, pour order 6): 20,1890 20,1610 335,1610 335,1140 380,1095 850,1095 900,1145 900,1255 620,1255 510,1365 510,1680 535,1705 600,1705 625,1680 625,1540 655,1510 735,1510 890,1665 890,1890
PGND on Bottom Layer "PGND_L02_P002" (solid, pour order 2): 1600,220 1485,220 1480,225 1480,445 1535,500 1535,830 1520,845 320,845 285,810 285,300 20,300 20,1315 250,1315 290,1275 290,1105 340,1055 1020,1055 1130,1165 1130,1620 1225,1715 1355,1715 1370,1700 1370,1485 1320,1435 1320,1245 1360,1205 1615,1205 1765,1055 1765,285 1700,220
VS1 on Bottom Layer "NONET_L-01_P-001" (solid, pour order 1): 725,220 725,815 1515,815 1515,505 1465,455 1465,200 1525,140 1525,20 925,20 855,90
V_IN on Bottom Layer "NONET_L-01_P-001" (solid, pour order 0): 20,255 20,20 790,20 790,115 705,200 705,815 330,815 330,295 290,255
GND on Top Layer "NONET_L-01_P-001" (solid, pour order 13): 3310,1890 1745,1890 1745,1200 755,1200 755,855 1770,855 1770,20 3310,20
+12 on Top Layer "NONET_L-01_P-001" (solid, pour order 11): 2555,1630 2885,1630 2895,1620 2895,1415 2890,1410 2555,1410
GND on Top Layer "GND_L01_P003" (solid, pour order 3): 2555,1860 2555,1700 2905,1700 2905,1860
V_IN on Top Layer "V_IN_L01_P010" (solid, pour order 10): 330,745 1870,745 2120,495 2120,415 2130,405 2430,405 2450,425 2450,540 2435,555 2140,555 1869.46,825.54 330.54,825.54 330,825
V_IN on Top Layer "V_IN_L01_P009" (solid, pour order 9): 20,255 705,255 705,200 790,115 790,20 20,20
V_OUT on Top Layer "V_OUT_L01_P008" (solid, pour order 8): 20,1890 20,1660 890,1660 890,1890
PGND on Top Layer "PGND_L01_P005" (solid, pour order 5): 20,1090 210,1090 210,810 285,810 285,300 20,300
NetNT1_1 on Top Layer "NETNT1_1_L01_P004" (solid, pour order 4): 300,920 300,1135 20,1135 20,1635 500,1635 500,920

## Keep-outs
Keep-Out Layer:
  the board outline again, w35

## Text inside footprints (layer, text, board x,y; h text height)
LS1: Bottom Overlay "+" at 3067,865.5 h60 r270